# Altium PCB BLE LED controller.PcbDoc
Units mm, origin at the board's own origin, x right, y up, seen from the top; angles counter-clockwise.
Board outline 152.4 x 101.6 mm, 2 copper layers (Top Layer, Bottom Layer); 17 components, 22 nets, 96 pads, 0 vias.
Unrouted connection lines stored in the file: 32.
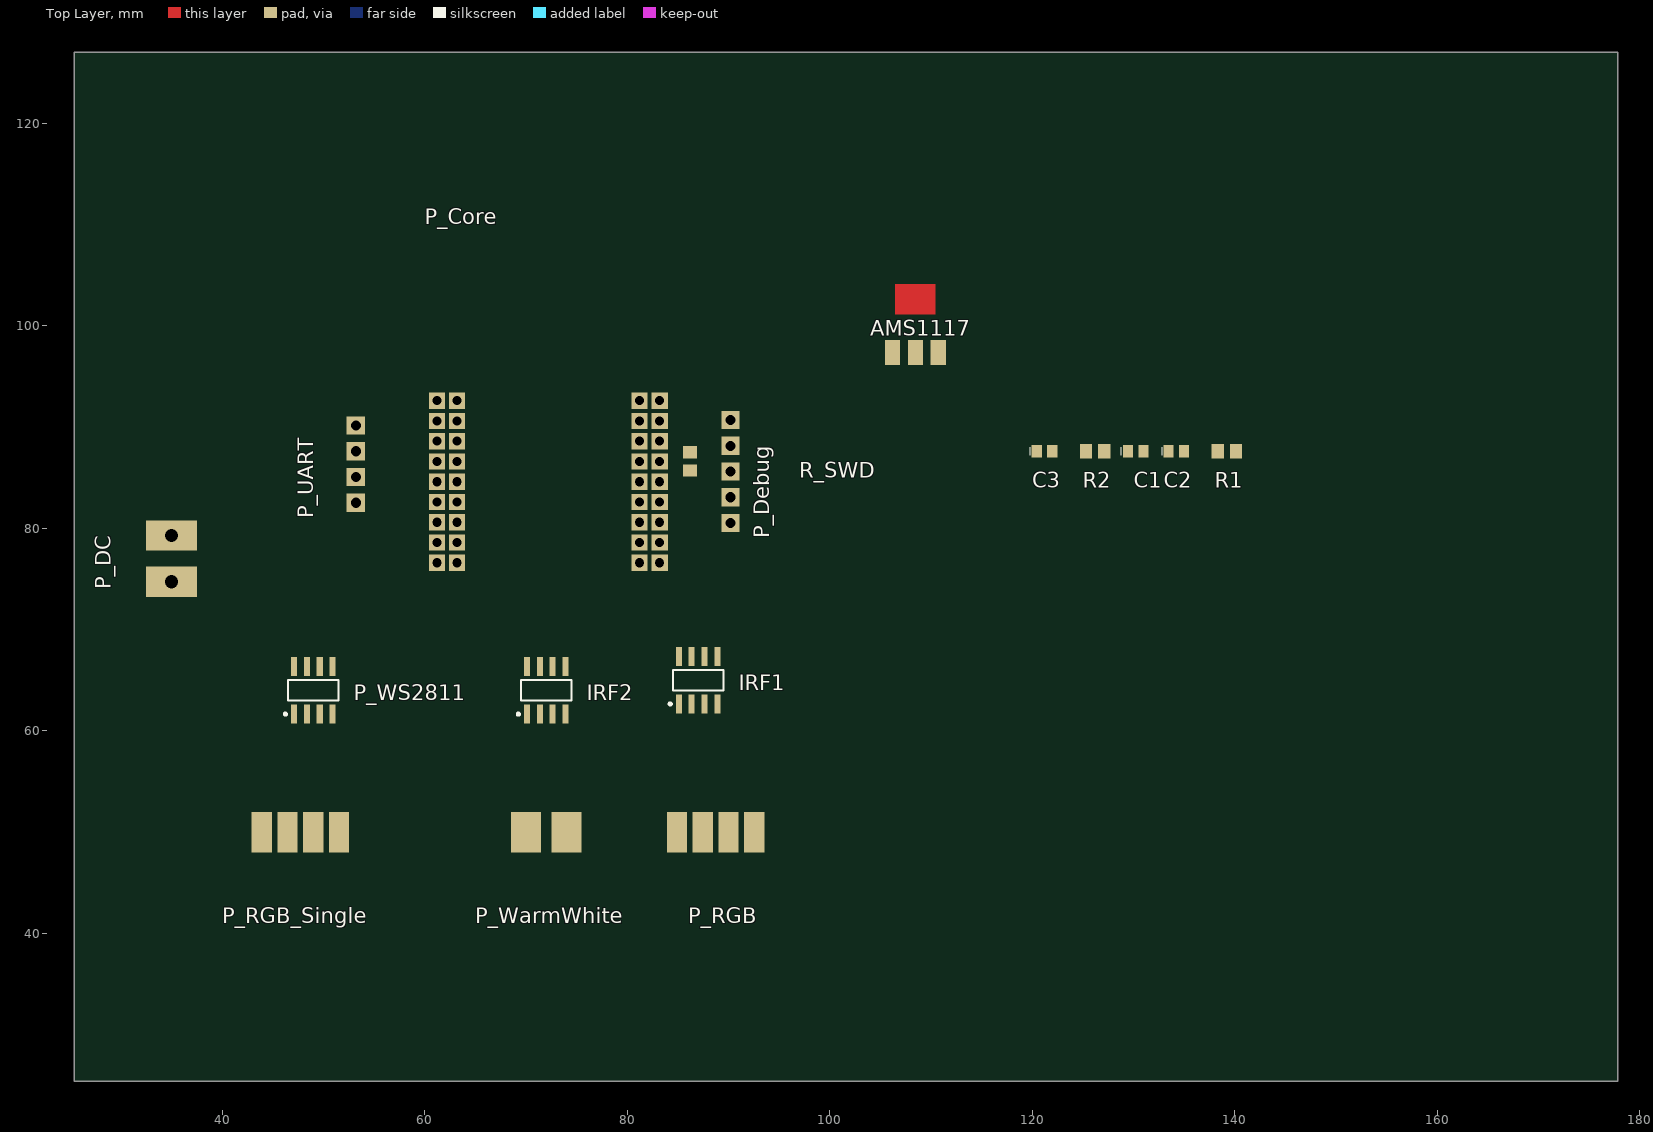
[diagram p0: Top Layer view]
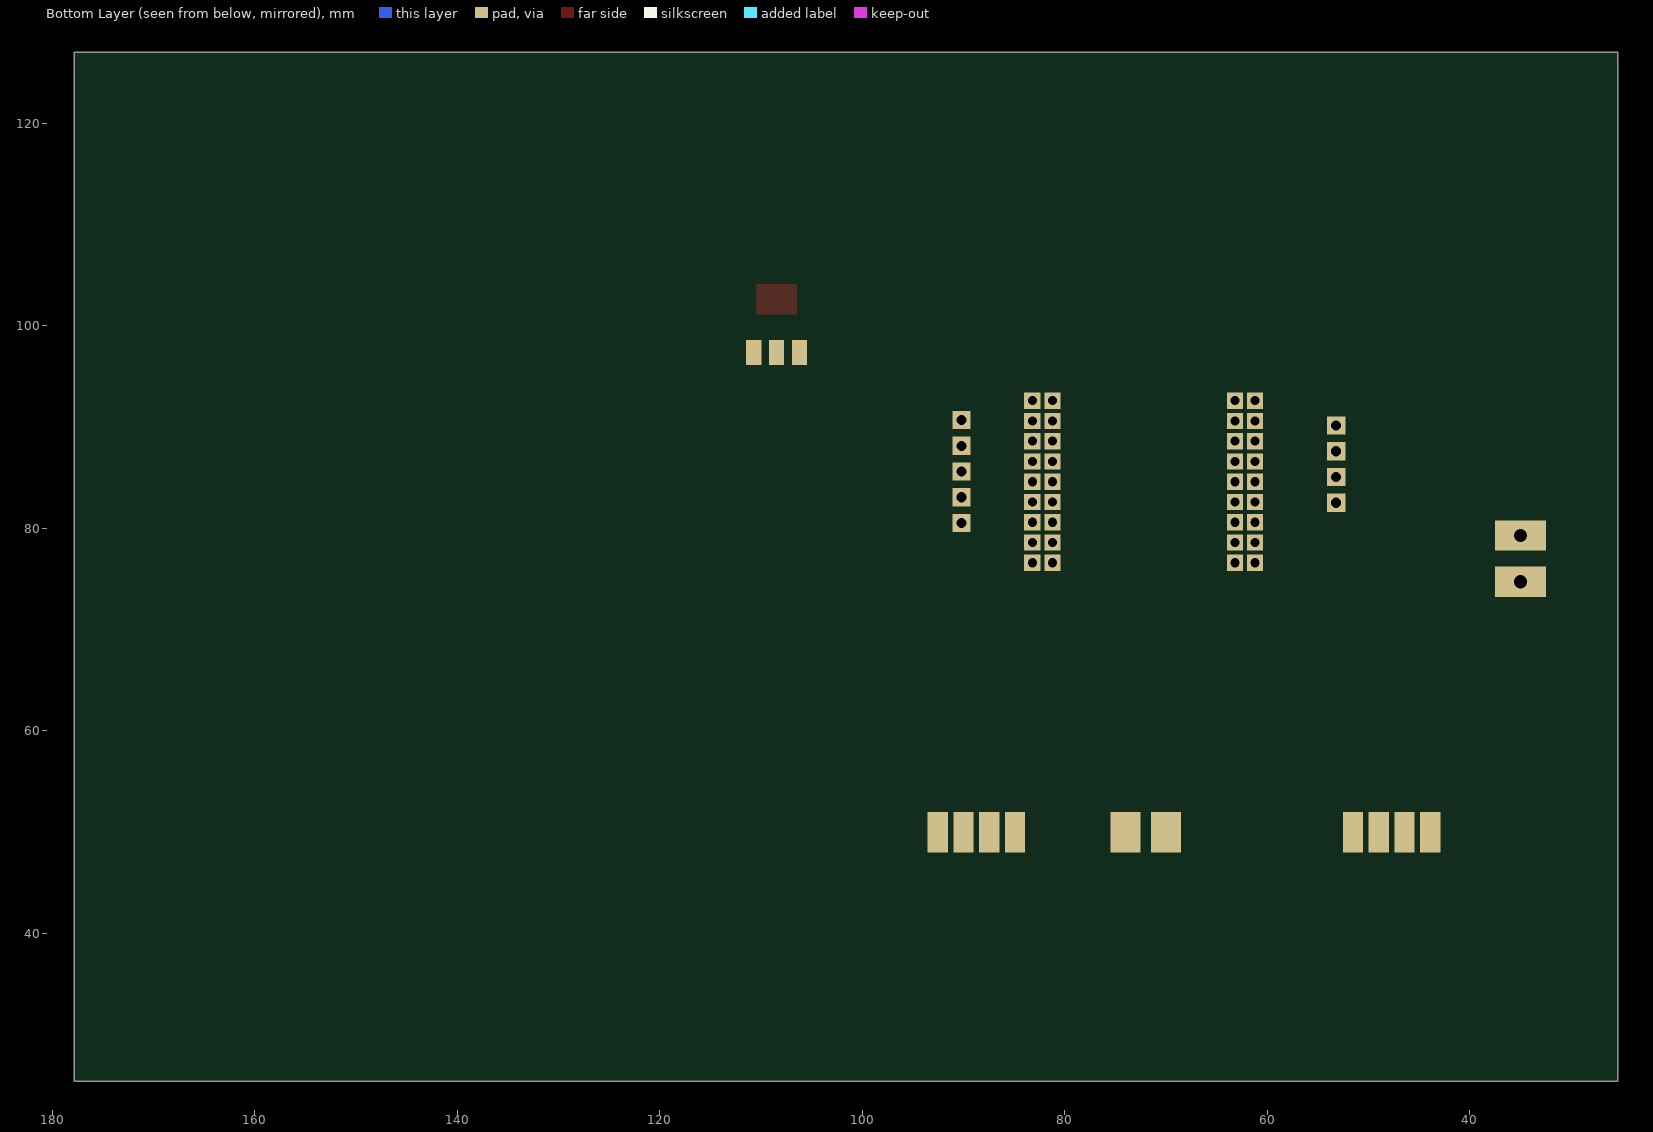
[diagram p1: Bottom Layer view, seen from below]

## Layer stack, top to bottom
Top Solder: solder mask 0.0102, Solder Resist, Dk 3.5
Top Layer: signal copper 0.0356
Dielectric 1: dielectric 0.32, FR-4, Dk 4.8
Bottom Layer: signal copper 0.0356
Bottom Solder: solder mask 0.0102, Solder Resist, Dk 3.5

## Board outline
25.4,25.4 177.8,25.4 177.8,127 25.4,127

## Design rules (kind name [scope] priority, off if disabled: settings)
Clearance [All] p1: gap=0.254
PolygonConnect [All] p1: connectstyle=Relief reliefconductorwidth=0.254 reliefentries=4 polygonreliefangle="90 Angle" airgapwidth=0.254
RoomDefinition WS2811S [InComponentClass('WS2811S')] p1: confinementstyle=ConfineIn formatcopy=TRUE lockcomponents=FALSE outline 24.2,-3.4 75,-3.4 75,22 24.2,22
RoomDefinition Top [InComponentClass('Top')] p2: confinementstyle=ConfineIn formatcopy=TRUE lockcomponents=FALSE outline 24.2,-3.4 75,-3.4 75,22 24.2,22
RoomDefinition "SWD resistor hack" [InComponentClass('SWD resistor hack')] p3: confinementstyle=ConfineIn formatcopy=TRUE lockcomponents=FALSE outline 24.2,-3.4 75,-3.4 75,22 24.2,22
RoomDefinition LDO [InComponentClass('LDO')] p4: confinementstyle=ConfineIn formatcopy=TRUE lockcomponents=FALSE outline 24.2,-3.4 75,-3.4 75,22 24.2,22
RoomDefinition FETs [InComponentClass('FETs')] p5: confinementstyle=ConfineIn formatcopy=TRUE lockcomponents=FALSE outline 203.2,24.6 229.2,24.6 229.2,39.6 203.2,39.6
RoutingVias [All] p1: holewidth=0.711 width=1.27 viastyle="Through Hole" minholewidth=0.711 minwidth=1.27 maxholewidth=0.711 maxwidth=1.27
SolderMaskExpansion [All] p1: expansion=0.102
UnpouredPolygon [All] p1: allowunpoured=FALSE
Width [All] p1: maxlimit=0.254 minlimit=0.254 preferedwidth=0.254
29 further rules are at their usual default settings.

## Classes and differential pairs
component class WS2811S: C_WS P_RGB_Single P_WS2811 R_WS
component class "SWD resistor hack": R_SWD
component class Top: P2 P_Core P_DC P_Debug P_UART
component class LDO: AMS1117 C1 C2 C3 R1 R2
component class FETs: IRF1 IRF2 LED_IC1 LED_IC2 LED_IC3 LED_P2 P_RGB P_WarmWhite

## Components (designator, comment, footprint, x,y, rotation, side; value= is the part's Value field where it differs from the comment)
AMS1117 "T1" SOT-223 105.2,96.6 r0 top
C1 "22uF" 0805-C 130.2,87.6 r0 top
C2 "22uF" 0805-C 134.2,87.6 r0 top
C3 "10uF" 0805-C 121.2,87.6 r0 top
IRF1 "IRF7301" SOIC-8 87,65 r90 top
IRF2 "IRF7301" SOIC-8 72,64 r90 top
P_Core "Core51822" CORE51822 60.2,75.6 r0 top
P_DC "Power supply" "DC connector" 35,77 r90 top
P_Debug "Header SWD" "Header 1x5 2.54mm" 90.2,85.6 r90 top
P_RGB "LED strip RGB" "LED strip RGB connector" 90,50 r180 top
P_RGB_Single "LED strip RGB" "LED strip RGB connector" 49,50 r180 top
P_UART "Header UART" "Header 1x4 2.54mm" 53.2,87.6 r90 top
P_WarmWhite "LED strip single color" "LED strip single color" 72,50 r180 top
P_WS2811 "WS2811S" SOIC-8 49,64 r90 top
R1 "47k" 0805-R 139.2,87.6 r0 top
R2 "27k" 0805-R 126.2,87.6 r0 top
R_SWD "Resistor" 0805-R 86.2,86.6 r270 top

## Footprints (in the part's own frame and the unit in brackets; to place one, negate y for a bottom-side part, rotate by r counter-clockwise, add the part's x,y. Pads: shape width x height; smd on the part's side, far side on the other; paste and mask are expansions set on the pad)
0805-C [mm]
  rect 1x1.2 smd mask+0.01: 1(-0.762,0) 2(0.762,0)
  silkscreen extent -1.4,-0.38 -1.4,0.38, body extent -1,-0.62 1,0.63, height 0.78
0805-R [mm] "Resistor 0805 / 2012 (2.0 x 1.2 mm)"
  rect 1.2x1.4 smd: 1(-0.9,0) 2(0.9,0)
  body extent -1,-0.62 1,0.62, height 0.45
CORE51822 [mm]
  rect 1.6x1.6 hole 0.9: 1(1,17) 2(3,17) 3(1,15) 4(3,15) 5(1,13) 6(3,13) 7(1,11) 8(3,11) 9(1,9) 10(3,9) 11(1,7) 12(3,7) 13(1,5) 14(3,5) 15(1,3) 16(3,3) 17(1,1) 18(3,1) 19(21,17) 20(23,17) 21(21,15) 22(23,15) 23(21,13) 24(23,13) 25(21,11) 26(23,11) 27(21,9) 28(23,9) 29(21,7) 30(23,7) 31(21,5) 32(23,5) 33(21,3) 34(23,3) 35(21,1) 36(23,1)
"DC connector" [mm]
  rect 3x5 hole 1.3: 1(-2.286,0) 2(2.286,0)
"Header 1x4 2.54mm" [mm]
  rect 1.8x1.8 hole 1: 1(-5.08,0) 2(-2.54,0) 3(0,0) 4(2.54,0)
"Header 1x5 2.54mm" [mm]
  rect 1.8x1.8 hole 1: 1(-5.08,0) 2(-2.54,0) 3(0,0) 4(2.54,0) 5(5.08,0)
"LED strip RGB connector" [mm]
  rect 2x4 all layers, no hole: 1(-2.54,0) 2(0,0) 3(2.54,0) 4(5.08,0)
"LED strip single color" [mm]
  rect 3x4 all layers, no hole: 1(-2,0) 2(2,0)
SOIC-8 [mm] "SOIC, 8-Leads, Body 4.9x3.9mm, Pitch 1.27mm, IPC High Density"
  rect 1.9x0.6 smd: 1(-2.35,1.905) 2(-2.35,0.635) 3(-2.35,-0.635) 4(-2.35,-1.905) 5(2.35,-1.905) 6(2.35,-0.635) 7(2.35,0.635) 8(2.35,1.905)
  silkscreen extent -2.47,-2.5 1,2.88, body extent -3,-2.45 3,2.45, height 1.75
SOT-223 [mm]
  rect 1.5x2.5 all layers, no hole: 1(1,0.75) 2(3.25,0.75) 3(5.5,0.75)
  Top Layer region: 1.25,4.5 5.25,4.5 5.25,7.5 1.25,7.5
  body extent 0,0 6.5,6.89, height 1.6

## Part data
AMS1117: library part AMS1117
C1 C2 C3: library part Capacitor
R1 R2: library part Resistor

## Nets (pads, with @x,y where several pads share a name; then routed paths per layer and width w, separated by ;. In a path a pad name is that pad's centre, name@x,y a point inside that pad or via, vN(x,y) a via of type N, cw(c..) or ccw(c..) an arc to the next point about the centre after c; other vN are vias at no path point)
3.3V: AMS1117.2 C2.2 P_Debug.1 P_UART.1 R1.2
12V: AMS1117.3 C1.2 P_DC.1 P_RGB.1 P_RGB_Single.1 P_WarmWhite.1
GND: C1.1 C2.1 C3.1 IRF1.1 IRF1.3 IRF2.1 IRF2.3 P_DC.2 P_Debug.5 P_UART.4 R2.1
NetAMS1117_1: AMS1117.1 C3.2 R1.1 R2.2
NetC_WS_2: 
NetIRF1_5: IRF1.5 IRF1.6 P_RGB.3
NetIRF1_7: IRF1.7 IRF1.8 P_RGB.2
NetIRF2_5: IRF2.5 IRF2.6 P_WarmWhite.2
NetIRF2_7: IRF2.7 IRF2.8 P_RGB.4
NetP_Core_P0.22: P_UART.3
NetP_Core_P0.24: P_UART.2
NetP_Core_SWDCLK: P_Debug.2
NetP_Core_SWDIO: P_Debug.3 R_SWD.2
NetP_Debug_4: P_Debug.4 R_SWD.1
NetP_RGB_Single_2: P_RGB_Single.2
NetP_RGB_Single_3: P_RGB_Single.3
NetP_RGB_Single_4: P_RGB_Single.4
P0.03: 
P0.05: IRF1.4
P0.06: IRF2.2
P0.07: IRF1.2
P0.08: IRF2.4
pads on no net: P_Core.1 P_Core.2 P_Core.3 P_Core.4 P_Core.5 P_Core.6 P_Core.7 P_Core.8 P_Core.9 P_Core.10 P_Core.11 P_Core.12 P_Core.13 P_Core.14 P_Core.15 P_Core.16 P_Core.17 P_Core.18 P_Core.19 P_Core.20 P_Core.21 P_Core.22 P_Core.23 P_Core.24 P_Core.25 P_Core.26 P_Core.27 P_Core.28 P_Core.29 P_Core.30 P_Core.31 P_Core.32 P_Core.33 P_Core.34 P_Core.35 P_Core.36 P_WS2811.1 P_WS2811.2 P_WS2811.3 P_WS2811.4 P_WS2811.5 P_WS2811.6 P_WS2811.7 P_WS2811.8